# Allegro board PROTOGEN.brd
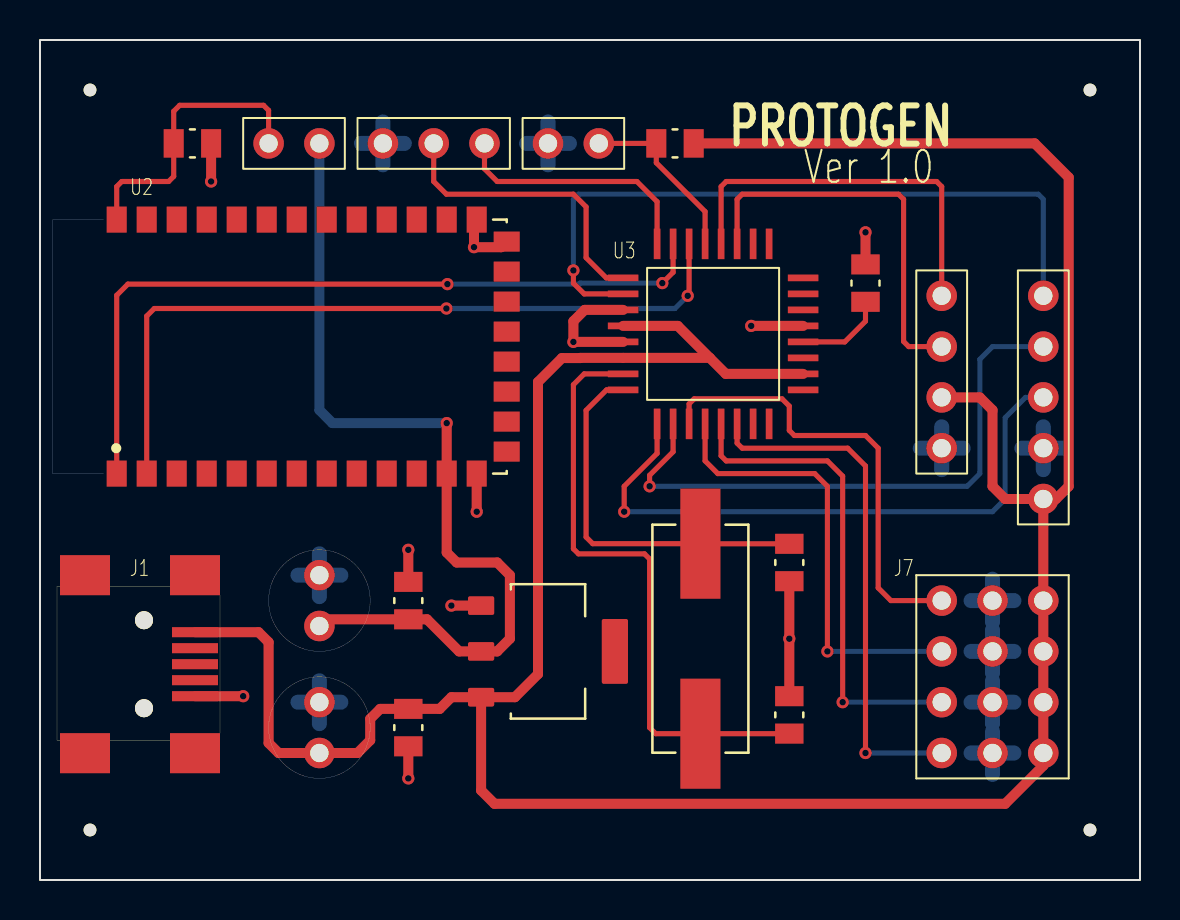
[diagram p0: board, top side]
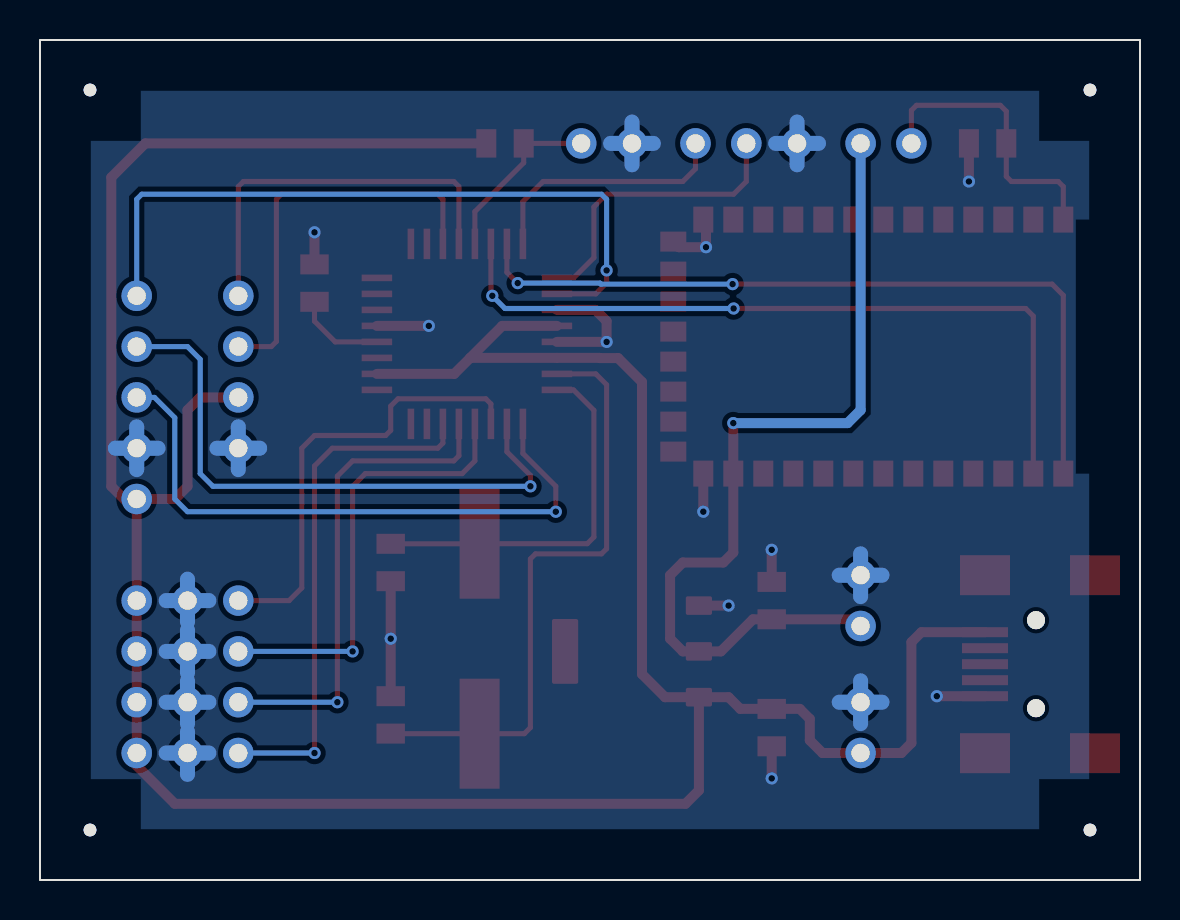
[diagram p1: board, bottom side, seen from below]

Outline 55 x 42 mm; copper layers: TOP, BOTTOM. Coordinates in mm from the lower left corner of the outline.
Outline path: rectangle 0,0 55,42

## Design rules (mm)
nets with their own width: min track width 0.5; nets 3.3V GND VCC

## Placement (name value [footprint] x y rotation side)
C1  10uF  [CAP196]  13.97 6.35 0 top
C2  0.1uF  [SMC2012]  18.41 7.62 270 top
C3  0.1uF  [SMC2012]  18.41 13.97 90 top
C4  10uF  [CAP196]  13.97 12.7 0 top
C5  0.1uF  [SMC2012]  41.27 29.84 90 top
C6  22pF  [SMC2012]  37.47 8.26 90 top
C7  22pF  [SMC2012]  37.47 15.88 270 top
J1  CON5  [USB_MINI_B]  0 15.24 0 top
J2  CON5  [JUMPER5]  50.16 29.21 270 top
J3  CON4  [JUMPER4]  45.09 29.21 270 top
J4  CON3  [JUMPER3]  22.23 36.83 180 top
J7  CON12  [JUMPER3X4]  45.09 13.97 0 top
NOREF  -  []  0 42 0 top
NOREF#2  -  []  0 42 0 top
NOREF#3  -  [unnamed#2]  2.5 2.5 0 top
NOREF#4  -  []  0 0 90 top
NOREF#5  -  [unnamed#2]  52.5 2.5 0 top
NOREF#6  -  [unnamed#2]  52.5 39.5 0 top
NOREF#7  -  [unnamed#2]  2.5 39.5 0 top
NOREF#8  -  []  2.5 39.5 90 top
R1  1K  [SMR2012]  31.75 36.83 180 top
R2  10K  [SMR2012]  7.62 36.83 0 top
SW1  RESET  [JUMPER2]  27.94 36.83 180 top
SW2  SW PUSHBUTTON  [JUMPER2]  11.43 36.83 0 top
U1  AMS1117  [SOT223]  25.4 11.43 0 top
U2  -  [HC-05]  3.81 20.32 90 top
U3  ATMEGA328-AU  [TQFP32]  33.66 27.3 0 top
Y1  16MHz  [HC49_SMD]  33.02 12.06 90 top

## Library data of the parts
C1 C4 = CAP POL: Tolerance: ***; User Part Number: ***
C2 C3 C5-C7 = CAP NP
J1 = CON5
J2 = CON5: User Part Number: ***
J3 = CON4: User Part Number: ***
J4 = CON3: User Part Number: ***
J7 = CON12
R1 R2 = RESISTOR
SW1 SW2 = SW PUSHBUTTON: User Part Number: ***
U1 = AMS1117_0
U2 = HC-05
U3 = ATMEGA328-AU_0
Y1 = CRYSTAL

## Footprints (pads in the part's own frame, mm; a bottom-side part is the same pattern mirrored in y, then rotated)
CAP196
  round 1.524 hole 0.914: 1(0,0) 2(0,2.54)
HC49_SMD
  rect 5.5x2 smd: 1(-4.75,0) 2(4.75,0)
HC-05
  rect 1.3x1 smd: 1(0,-0.025) 2(0,-1.525) 3(0,-3.025) 4(0,-4.525) 5(0,-6.025) 6(0,-7.525) 7(0,-9.025) 8(0,-10.525) 9(0,-12.025) 10(0,-13.525) 11(0,-15.025) 12(0,-16.525) 13(0,-18.025) 22(12.7,-18.025) 23(12.7,-16.525) 24(12.7,-15.025) 25(12.7,-13.525) 26(12.7,-12.025) 27(12.7,-10.525) 28(12.7,-9.025) 29(12.7,-7.525) 30(12.7,-6.025) 31(12.7,-4.525) 32(12.7,-3.025) 33(12.7,-1.525) 34(12.7,-0.025)
  rect 1x1.3 smd: 14(1.1,-19.525) 15(2.6,-19.525) 16(4.1,-19.525) 17(5.6,-19.525) 18(7.1,-19.525) 19(8.6,-19.525) 20(10.1,-19.525) 21(11.6,-19.525)
JUMPER2
  round 1.524 hole 0.914: 1(0,0) 2(2.54,0)
JUMPER3
  round 1.524 hole 0.914: 1(0,0) 2(2.54,0) 3(5.08,0)
JUMPER3X4
  round 1.524 hole 0.914: 1(0,0) 2(0,-2.54) 3(0,-5.08) 4(0,-7.62) 5(2.54,0) 6(2.54,-2.54) 7(2.54,-5.08) 8(2.54,-7.62) 9(5.08,0) 10(5.08,-2.54) 11(5.08,-5.08) 12(5.08,-7.62)
JUMPER4
  round 1.524 hole 0.914: 1(0,0) 2(2.54,0) 3(5.08,0) 4(7.62,0)
JUMPER5
  round 1.524 hole 0.914: 1(0,0) 2(2.54,0) 3(5.08,0) 4(7.62,0) 5(10.16,0)
SMC2012
  rect 1x1.42 smd: 1(-0.935,0) 2(0.935,0)
SMR2012
  rect 1x1.42 smd: 1(-0.935,0) 2(0.935,0)
SOT223
  custom 1.31x0.93 smd: 1(-3.345,2.29) 2(-3.345,0) 3(-3.345,-2.29)
  custom 1.31x3.24 smd: 4(3.345,0)
TQFP32
  rect 1.524x0.33 smd: 1(-4.5,2.8) 2(-4.5,2) 3(-4.5,1.2) 4(-4.5,0.4) 5(-4.5,-0.4) 6(-4.5,-1.2) 7(-4.5,-2) 8(-4.5,-2.8) 17(4.5,-2.8) 18(4.5,-2) 19(4.5,-1.2) 20(4.5,-0.4) 21(4.5,0.4) 22(4.5,1.2) 23(4.5,2) 24(4.5,2.8)
  rect 0.33x1.524 smd: 9(-2.8,-4.5) 10(-2,-4.5) 11(-1.2,-4.5) 12(-0.4,-4.5) 13(0.4,-4.5) 14(1.2,-4.5) 15(2,-4.5) 16(2.8,-4.5) 25(2.8,4.5) 26(2,4.5) 27(1.2,4.5) 28(0.4,4.5) 29(-0.4,4.5) 30(-1.2,4.5) 31(-2,4.5) 32(-2.8,4.5)
unnamed#2
  round 0.635 hole 3.175 unplated: (0,0)
USB_MINI_B
  rect 2.5x2 smd: (2.25,0) (2.25,-8.9) (7.75,0) (7.75,-8.9)
  round 0.9 hole 0.9 unplated: (5.2,-2.25) (5.2,-6.65)
  rect 2.3x0.5 smd: 1(7.75,-2.85) 2(7.75,-3.65) 3(7.75,-4.45) 4(7.75,-5.25) 5(7.75,-6.05)

## Nets
3.3V: C3.1 C4.1 SW2.2 U1.2(VOUT) U2.12(3.3_VCC)
GND: C1.2 C2.2 C3.2 C4.2 C5.2 C6.2 C7.2 J1.5 J2.4 J3.4 J4.3 J7.5 J7.6 J7.7 J7.8 R2.2 SW1.2 U1.1(ADJ/GND) U2.13 U2.21 U2.22 U3.3 U3.5 U3.21
VCC: C1.1 C2.1 J1.1 J2.5 J3.3 J7.9 J7.10 J7.11 J7.12 R1.1 U1.3(VIN) U3.4 U3.6 U3.18
CLK: J2.2 U3.10(PD6)
CS: J2.1 U3.2(PD4)
DIN: J2.3 U3.9(PD5)
I2C_C: J3.1 U3.28(PC5)
I2C_D: J3.2 U3.27(PC4)
RX: U2.1(UART-TX) U3.31(PD1)
S_RX: J4.1 U3.32(PD2)
S_TX: J4.2 U3.1(PD3)
TX: U2.2(UART-RX) U3.30(PD0)
N08731: C6.1 U3.7(PB6) Y1.1
N08739: C7.1 U3.8(PB7) Y1.2
N11012: C5.1 U3.20(AREF)
N23050: J7.2 U3.12(PB0)
N23060: J7.4 U3.14(PB2)
N23249: J7.3 U3.13(PB1)
N23855: J7.1 U3.11(PD7)
N26423: R1.2 SW1.1 U3.29(PC6)
N34453: R2.1 SW2.1 U2.34(PIO[11])

Pads without a net: J1 2 3 4; U1 4; U2 3 4 5 6 7 8 9 10 11 14 15 16 17 18 19 20 23 24 25 26 27 28 29 30 31 32 33; U3 15 16 17 19 22 23 24 25 26

## Via types
v1: diameter 0.61, hole 0.33, TOP to BOTTOM, 22 vias

## Routing (per net, layer and track width the routed paths; a pad name or vN(x,y) marks a point on that pad's centre or on a via; arc(x,y) is an arc through that point)
3.3V: length 43.8
  TOP w0.5: C4.1 14.3,13.04 C3.1 19.35,13.04 20.95,11.43 U1.2 22.86,11.43 23.5,12.06 23.5,15.24 22.86,15.88 20.84,15.88 20.34,16.38 v1(20.34,22.84)
  BOTTOM w0.5: v1(20.34,22.84) 14.62,22.84 13.97,23.49 SW2.2
GND: length 73.1
  TOP w0.5: U2.22 21.7,32.88 v1(21.7,31.64) 23.05,31.64 U2.21 ; U3.5 v1(26.67,26.91) 26.67,27.94 27.23,28.5 U3.3 ; C5.2 v1(41.27,32.38) ; 18.41,6.68 v1(18.41,5.08) ; 21.84,20.32 v1(21.84,18.41) ; U1.1 v1(20.57,13.72) ; R2.2 v1(8.55,34.92) ; J1.5 v1(10.16,9.19) ; 18.41,14.9 v1(18.41,16.51) ; C6.2 v1(37.47,12.06) C7.2 ; U3.21 v1(35.56,27.7)
  BOTTOM w0.754: J7.6 48.69,11.43 ; J7.6 47.62,12.5 ; J7.6 46.56,11.43 ; J7.6 47.62,10.36 ; 17.14,36.83 17.14,37.9 ; 17.14,36.83 18.21,36.83 ; 17.14,36.83 16.08,36.83 ; 17.14,36.83 17.14,35.76 ; 46.56,13.97 J7.5 ; J7.5 47.62,15.04 ; J7.5 47.62,12.9 ; J7.5 48.69,13.97 ; J7.8 47.62,7.42 ; J7.8 46.56,6.35 ; J7.8 47.62,5.28 ; J7.8 48.69,6.35 ; J7.7 48.69,8.89 ; J7.7 47.62,9.96 ; J7.7 47.62,7.82 ; J7.7 46.56,8.89 ; 13.97,14.17 C4.2 ; C4.2 15.04,15.24 ; C4.2 13.97,16.31 ; C4.2 12.9,15.24 ; SW1.2 25.4,37.9 ; SW1.2 26.47,36.83 ; SW1.2 24.33,36.83 ; SW1.2 25.4,35.76 ; C1.2 15.04,8.89 ; C1.2 13.97,9.96 ; C1.2 13.97,7.82 ; C1.2 12.9,8.89 ; J2.4 51.23,21.59 ; J2.4 50.16,20.52 ; J2.4 49.1,21.59 ; J2.4 50.16,22.66 ; 44.02,21.59 J3.4 ; J3.4 45.09,22.66 ; J3.4 46.15,21.59 ; J3.4 45.09,20.52
VCC: length 151.6
  TOP w0.5: R1.1 49.74,36.83 51.44,35.13 51.44,19.68 50.8,19.05 J2.5 ; 33.49,26.11 U3.6 27.02,26.11 27.01,26.1 26.1,26.1 24.9,24.9 24.9,10.29 23.75,9.14 U1.3 ; 33.49,26.11 31.89,27.7 U3.4 ; 33.49,26.11 34.29,25.3 U3.18 ; U1.3 20.57,9.14 19.98,8.55 C2.1 17.01,8.55 16.51,8.05 16.51,6.99 15.88,6.35 C1.1 11.93,6.35 11.43,6.85 11.43,11.89 10.93,12.39 J1.1 ; U1.3 22.05,4.48 22.73,3.81 48.26,3.81 50.16,5.72 J7.12 J7.11 J7.10 J7.9 J2.5 ; J2.5 48.26,19.05 47.62,19.68 47.62,23.5 46.99,24.13 J3.3
CLK: length 29.5
  TOP w0.254: U3.10 31.66,21.41 30.48,20.24 v1(30.48,19.68)
  BOTTOM w0.254: J2.2 47.62,26.67 46.99,26.04 46.99,20.32 46.35,19.68 v1(30.48,19.68)
CS: length 35.4
  TOP w0.254: U3.2 27.21,29.3 26.67,29.84 v1(26.67,30.48)
  BOTTOM w0.254: v1(26.67,30.48) 26.67,34.04 26.92,34.29 49.91,34.29 50.16,34.04 J2.1
DIN: length 30.8
  TOP w0.254: v1(29.21,18.41) 29.21,19.68 30.86,21.33 U3.9
  BOTTOM w0.254: J2.3 49.28,24.13 48.26,23.11 48.26,19.05 47.63,18.41 v1(29.21,18.41)
I2C_C: length 19.6
  TOP w0.254: J3.1 45.09,34.67 44.83,34.92 34.31,34.92 34.05,34.67 U3.28
I2C_D: length 19.9
  TOP w0.254: J3.2 43.44,26.67 43.18,26.93 43.18,34.03 42.92,34.29 35.11,34.29 34.85,34.03 U3.27
RX: length 38.6
  TOP w0.254: U2.1 3.83,29.23 4.39,29.79 v1(20.37,29.79) ; v1(31.11,29.84) 31.66,30.39 U3.31
  BOTTOM w0.254: v1(31.11,29.84) 27.01,29.84 26.95,29.79 v1(20.37,29.79)
S_RX: length 12.7
  TOP w0.254: J4.1 22.23,35.56 22.86,34.92 29.84,34.92 30.86,33.91 U3.32
S_TX: length 14.9
  TOP w0.254: U3.1 28.32,30.11 27.3,31.11 27.3,33.66 26.67,34.29 20.32,34.29 19.68,34.92 19.68,36.83
TX: length 38
  TOP w0.254: U2.2 5.33,28.2 5.71,28.57 v1(20.32,28.57) ; v1(32.38,29.21) 32.45,29.28 U3.30
  BOTTOM w0.254: v1(20.32,28.57) 31.75,28.57 v1(32.38,29.21)
N08731: length 30.5
  TOP w0.254: C6.1 37.46,7.32 30.79,7.32 30.48,7.62 30.48,16.05 30.23,16.31 26.93,16.31 26.67,16.56 26.67,24.77 27.21,25.3 U3.7
N08739: length 18.9
  TOP w0.254: U3.8 28.33,24.5 27.3,23.48 27.3,17.15 27.64,16.82 33.02,16.82 33.02,16.81 C7.1
N11012: length 4.5
  TOP w0.254: C5.1 41.27,27.94 40.24,26.91 U3.20
N23050: length 22.5
  TOP w0.254: U3.12 33.26,20.95 33.89,20.32 38.74,20.32 39.37,19.69 v1(39.37,11.43)
  BOTTOM w0.254: v1(39.37,11.43) J7.2
N23060: length 26
  TOP w0.254: v1(41.27,6.35) 41.27,20.7 40.39,21.59 35.11,21.59 34.85,21.84 U3.14
  BOTTOM w0.254: J7.4 v1(41.27,6.35)
N23249: length 24.3
  TOP w0.254: U3.13 34.05,21.21 34.31,20.95 39.37,20.95 40.13,20.19 v1(40.13,8.89)
  BOTTOM w0.254: J7.3 v1(40.13,8.89)
N23855: length 22.7
  TOP w0.254: U3.11 32.45,23.81 32.71,24.06 37.1,24.06 37.47,23.69 37.47,22.48 37.72,22.23 41.27,22.23 41.91,21.59 41.91,14.6 42.54,13.97 J7.1
N26423: length 8.9
  TOP w0.254: SW1.1 R1.2 30.82,35.86 33.26,33.42 U3.29
N34453: length 14.6
  TOP w0.254: U2.34 3.83,34.67 4.09,34.92 6.43,34.92 6.68,35.18 6.68,38.44 6.99,38.73 11.18,38.73 11.43,38.48 SW2.1

## Copper pours and planes (outline as drawn; the poured copper is in the pictures)
GND on BOTTOM: 2.54,2.54 2.54,39.46 52.46,39.46 52.46,2.54

## Text on the board
Ref Des/Silkscreen Top: Ver 1.0 | PROTOGEN
DIMENSION: FIGURE | SIZE | 0.33 | 0.914 | 0.9 | 3.175 | DRILL CHART: TOP to BOTTOM | ALL UNITS ARE IN MILLIMETERS | PLATED | NON-PLATED | QTY | 22 | 32 | 2 | 4
